# Altium PCB PANEL_ALL.PcbDoc
Units mil, origin at the board's own origin, x right, y up, seen from the top; angles counter-clockwise.
Board outline 12395 x 9800.57 mil, 2 copper layers (Top Layer, Bottom Layer); 60 components, 0 nets, 300 pads, 0 vias.
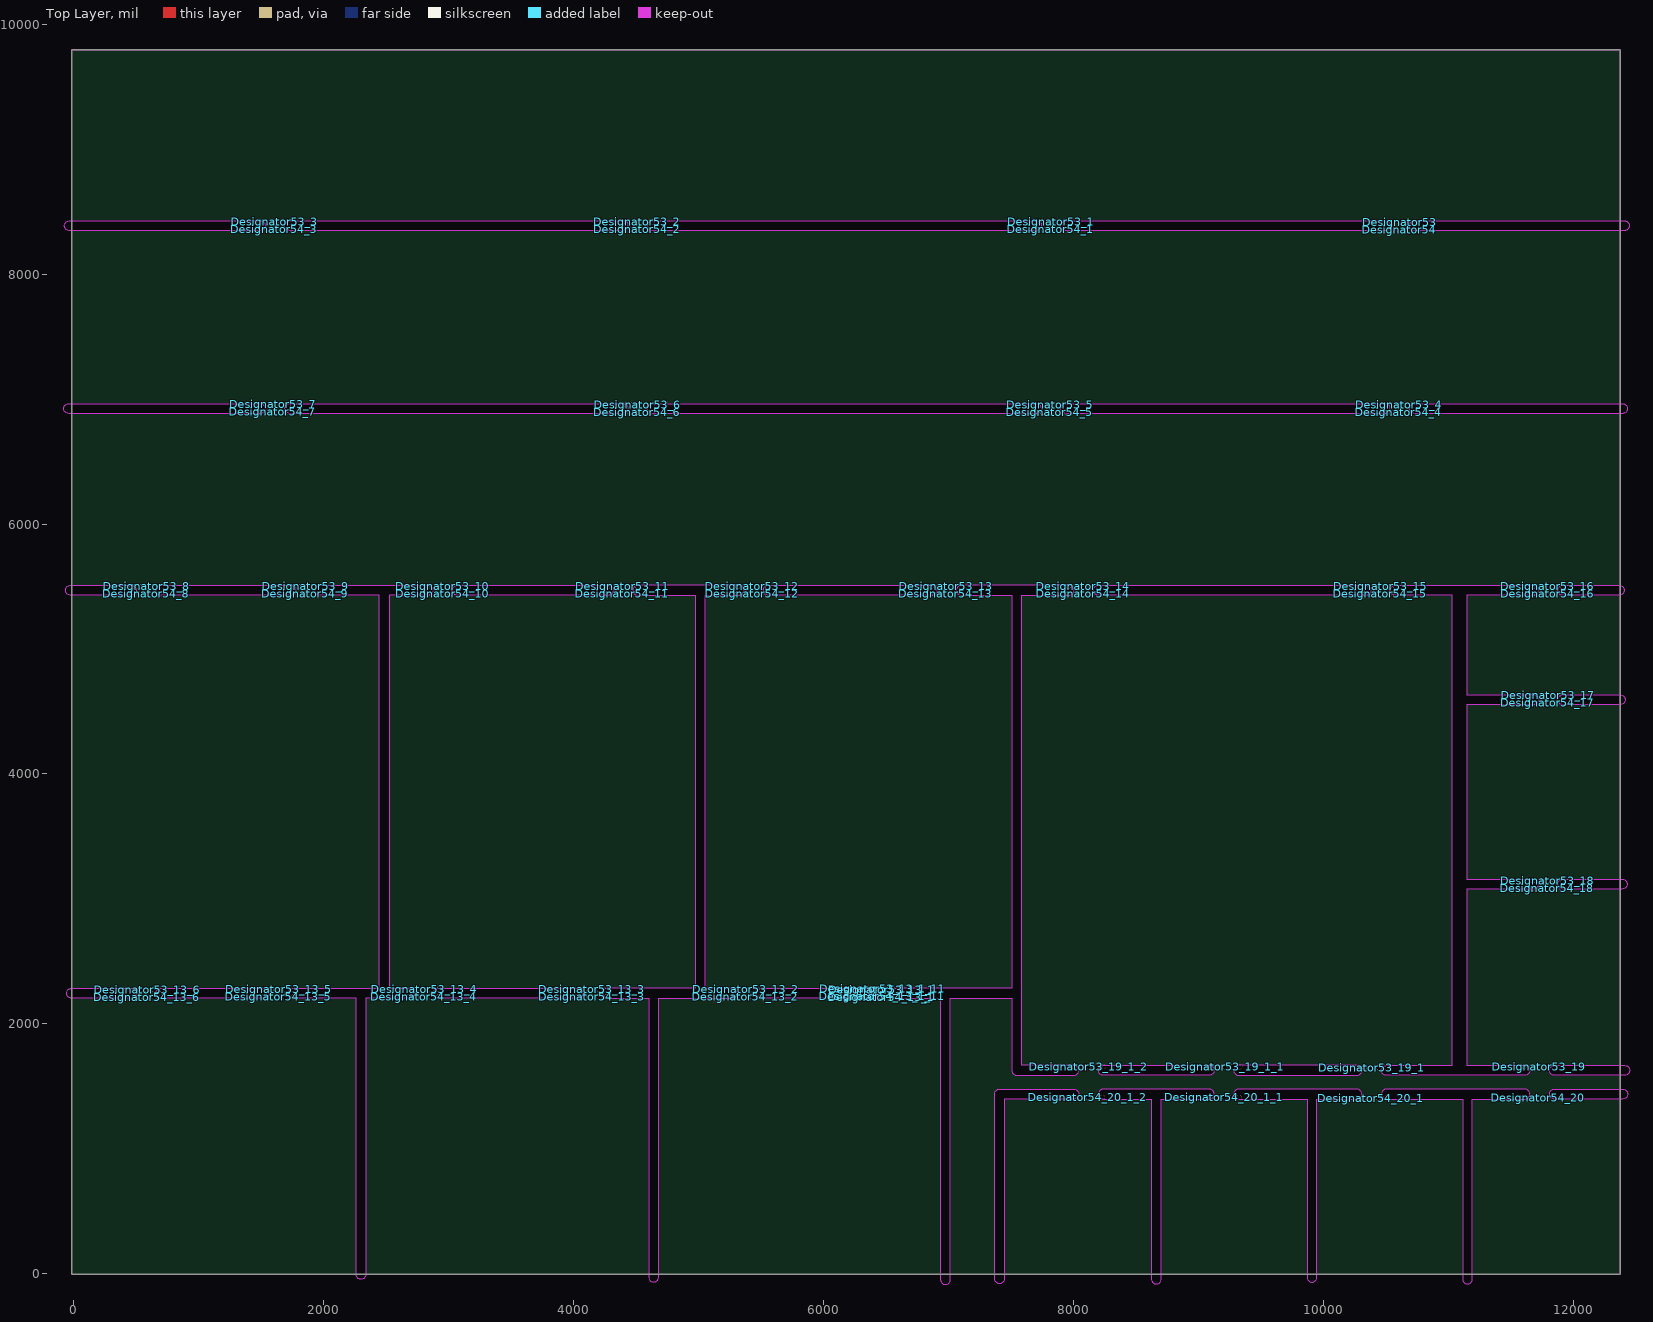
[diagram p0: Top Layer view]
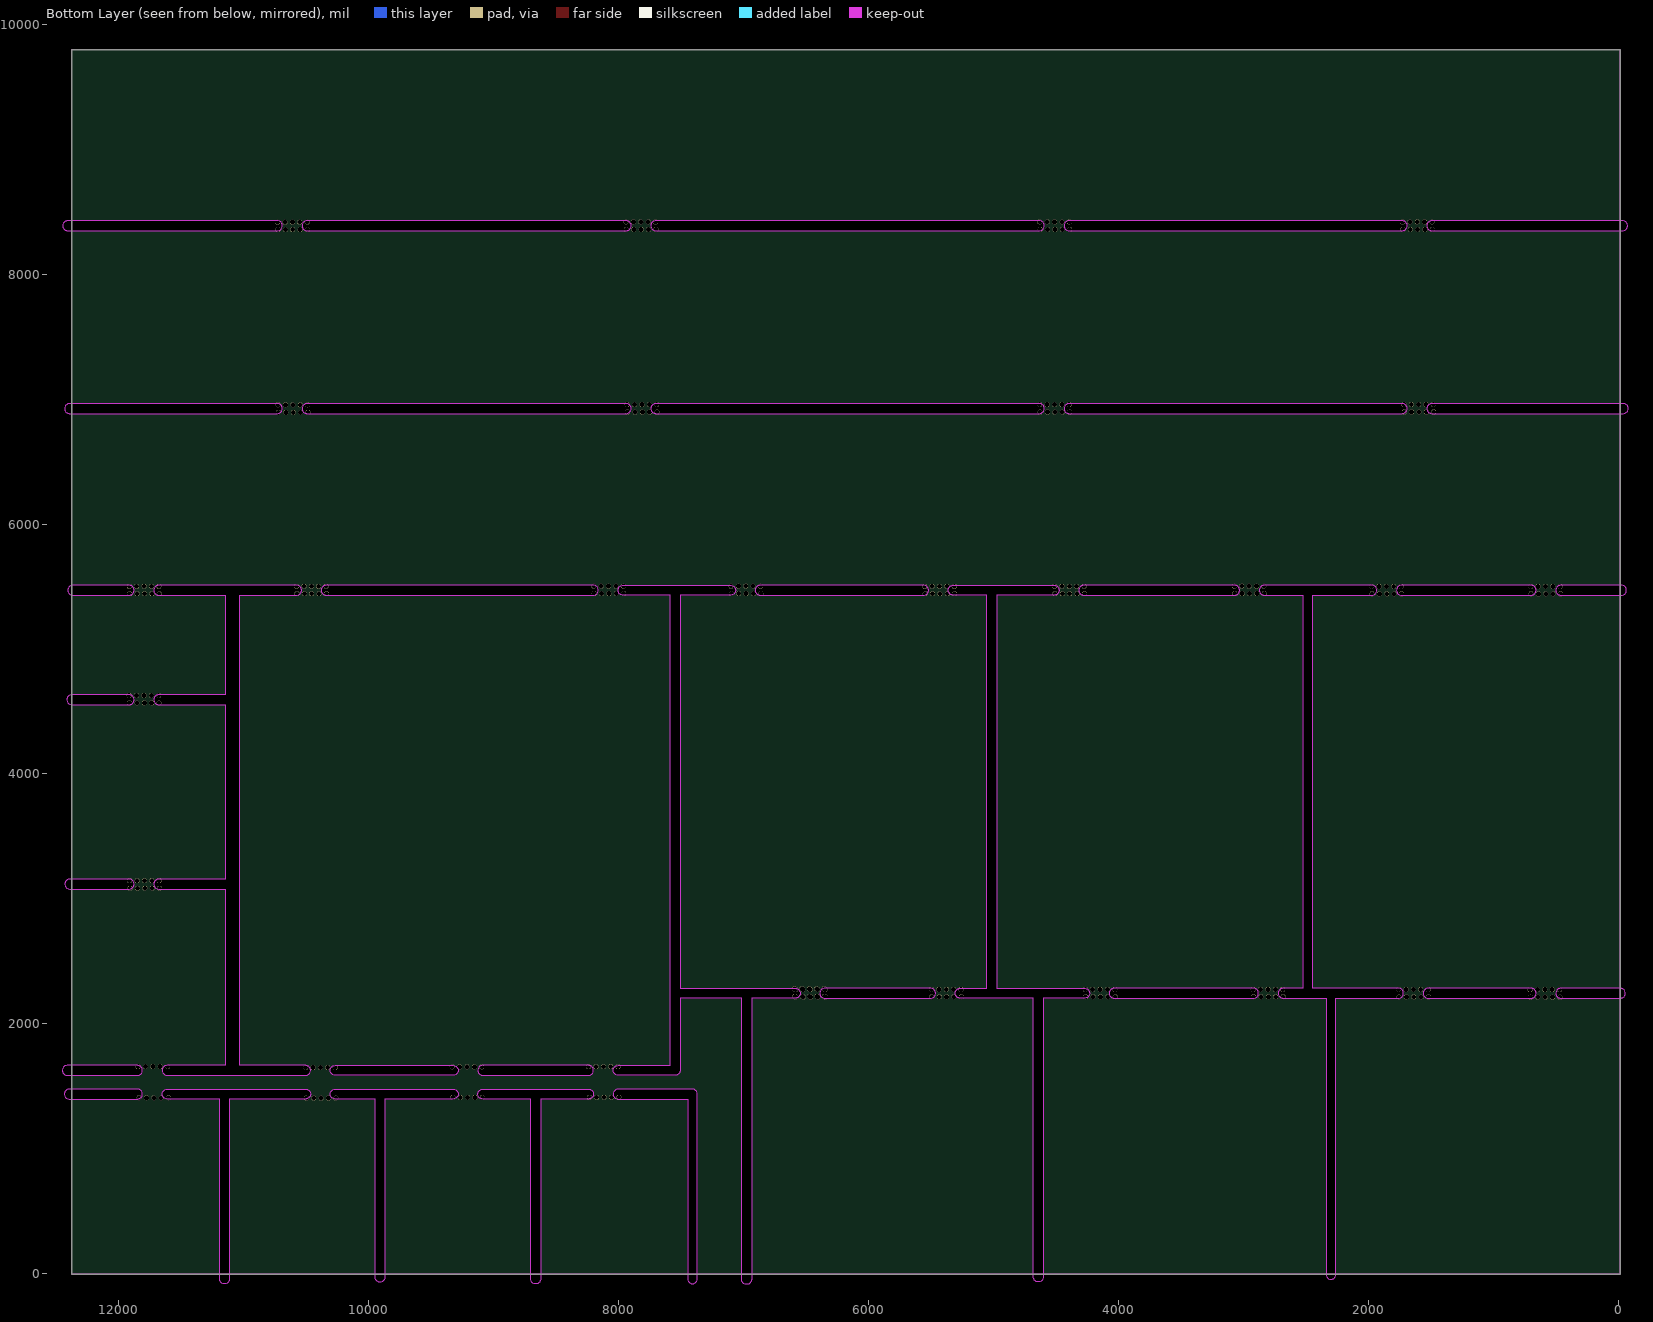
[diagram p1: Bottom Layer view, seen from below]

## Layer stack, top to bottom
Top Solder: solder mask 0.4, Solder Resist, Dk 3.5
Top Layer: signal copper 1.4
Dielectric 1: dielectric 12.6, FR-4, Dk 4.8
Bottom Layer: signal copper 1.4
Bottom Solder: solder mask 0.4, Solder Resist, Dk 3.5

## Board outline
-17,-4 12378,-4 12378,9796.57 -17,9796.57
cut-out: 2259.61,-6 2259.61,2204.61 1758,2204.61 cw(c1758,2244) 1758,2283.39 2444.61,2283.39 2444.61,5430.61 1971,5430.61 cw(c1971,5470) 1971,5509.39 2833,5509.39 cw(c2833,5470) 2872.39,5470 cw(c2833,5470) 2833,5430.61 2523.39,5430.61 2523.39,2283.39 2682,2283.39 cw(c2682,2244) 2721.39,2244 cw(c2682,2244) 2682,2204.61 2338.39,2204.61 2338.39,-6 cw(c2299,-6)
cut-out: 4270,2204.61 4601.61,2204.61 4601.61,-27 ccw(c4641,-27) 4680.39,-27 4680.39,2204.61 5267,2204.61 ccw(c5267,2244) 5306.39,2244 ccw(c5267,2244) 5267,2283.39 5053.39,2283.39 5053.39,5430.61 5323,5430.61 ccw(c5323,5470) 5362.39,5470 ccw(c5323,5470) 5323,5509.39 5026.39,5509.39 ccw(c5014,5472) 5001.61,5509.39 4514,5509.39 ccw(c4514,5470) 4514,5430.61 4974.61,5430.61 4974.61,2283.39 4270,2283.39 ccw(c4270,2244)
cut-out: 10506,1397.61 11115.61,1397.61 11115.61,-43 ccw(c11155,-43) 11194.39,-43 11194.39,1397.61 11615,1397.61 ccw(c11615,1437) 11654.39,1437 ccw(c11615,1437) 11615,1476.39 10506,1476.39 ccw(c10506,1437)
cut-out: 9324,1397.61 9870.61,1397.61 9870.61,-29 ccw(c9910,-29) 9949.39,-29 9949.39,1397.61 10270,1397.61 ccw(c10270,1437) 10309.39,1437 ccw(c10270,1437) 10270,1476.39 9324,1476.39 ccw(c9324,1437)
cut-out: 8241,1397.61 8625.11,1397.61 8625.11,-43.5 ccw(c8664.5,-43.5) 8703.89,-43.5 8703.89,1397.61 9088,1397.61 ccw(c9088,1437) 9127.39,1437 ccw(c9088,1437) 9088,1476.39 8241,1476.39 ccw(c8241,1437)
cut-out: 6586,2204.61 6936.61,2204.61 6936.61,-47 ccw(c6976,-47) 7015.39,-47 7015.39,2204.61 7508.61,2204.61 7508.61,1627 ccw(c7548,1627) 7548,1587.61 8005,1587.61 ccw(c8005,1627) 8044.39,1627 ccw(c8005,1627) 8005,1666.39 7587.39,1666.39 7587.39,2313 7587.38,5430.61 7966,5430.61 ccw(c7966,5470) 8005.39,5470 ccw(c7966,5470) 7966,5509.39 7104,5509.39 ccw(c7104,5470) 7104,5430.61 7508.61,5430.61 7508.61,2313 7508.61,2283.39 6991.08,2283.39 ccw(c6976,2247) 6960.92,2283.39 6586,2283.39 ccw(c6586,2244)
cut-out: 7369.61,-41 7369.61,1437 cw(c7409,1437) 7409,1476.39 8005,1476.39 cw(c8005,1437) 8044.39,1437 cw(c8005,1437) 8005,1397.61 7448.39,1397.61 7448.39,-41 cw(c7409,-41)
cut-out: 10731,6884.61 cw(c10731,6924) 10731,6963.39 12396,6963.39 cw(c12396,6924) 12435.39,6924 cw(c12396,6924) 12396,6884.61
cut-out: 10731,8348.61 cw(c10731,8388) 10731,8427.39 12411,8427.39 cw(c12411,8388) 12450.39,8388 cw(c12411,8388) 12411,8348.61
cut-out: 7939,6884.61 cw(c7939,6924) 7939,6963.39 10495,6963.39 cw(c10495,6924) 10534.39,6924 cw(c10495,6924) 10495,6884.61
cut-out: 7939,8348.61 cw(c7939,8388) 7939,8427.39 10495,8427.39 cw(c10495,8388) 10534.39,8388 cw(c10495,8388) 10495,8348.61
cut-out: 4632,6884.61 cw(c4632,6924) 4632,6963.39 7703,6963.39 cw(c7703,6924) 7742.39,6924 cw(c7703,6924) 7703,6884.61
cut-out: 4632,8348.61 cw(c4632,8388) 4632,8427.39 7703,8427.39 cw(c7703,8388) 7742.39,8388 cw(c7703,8388) 7703,8348.61
cut-out: 1728,6884.61 cw(c1728,6924) 1728,6963.39 4396,6963.39 cw(c4396,6924) 4435.39,6924 cw(c4396,6924) 4396,6884.61
cut-out: 1728,8348.61 cw(c1728,8388) 1728,8427.39 4396,8427.39 cw(c4396,8388) 4435.39,8388 cw(c4396,8388) 4396,8348.61
cut-out: -42,6884.61 cw(c-42,6924) -42,6963.39 1492,6963.39 cw(c1492,6924) 1531.39,6924 cw(c1492,6924) 1492,6884.61
cut-out: -36,8348.61 cw(c-36,8388) -36,8427.39 1492,8427.39 cw(c1492,8388) 1531.39,8388 cw(c1492,8388) 1492,8348.61
cut-out: 11918,5430.61 cw(c11918,5470) 11918,5509.39 12369,5509.39 cw(c12369,5470) 12408.39,5470 cw(c12369,5470) 12369,5430.61
cut-out: 8241,1587.61 cw(c8241,1627) 8241,1666.39 9088,1666.39 cw(c9088,1627) 9127.39,1627 cw(c9088,1627) 9088,1587.61
cut-out: 9324,1587.61 10270,1587.61 ccw(c10270,1627) 10309.39,1627 ccw(c10270,1627) 10270,1666.39 9324,1666.39 ccw(c9324,1627)
cut-out: 11851,1397.61 cw(c11851,1437) 11851,1476.39 12398,1476.39 cw(c12398,1437) 12437.39,1437 cw(c12398,1437) 12398,1397.61
cut-out: 11851,1587.61 cw(c11851,1627) 11851,1666.39 12414,1666.39 cw(c12414,1627) 12453.39,1627 cw(c12414,1627) 12414,1587.61
cut-out: 11918,3078.61 cw(c11918,3118) 11918,3157.39 12394,3157.39 cw(c12394,3118) 12433.39,3118 cw(c12394,3118) 12394,3078.61
cut-out: 11918,4554.61 cw(c11918,4594) 11918,4633.39 12377,4633.39 cw(c12377,4594) 12416.39,4594 cw(c12377,4594) 12377,4554.61
cut-out: 10506,1587.61 cw(c10506,1627) 10506,1666.39 11031.93,1666.39 11031.93,5430.61 10578,5430.61 cw(c10578,5470) 10578,5509.39 11682,5509.39 cw(c11682,5470) 11721.39,5470 cw(c11682,5470) 11682,5430.61 11150.07,5430.61 11150.07,4633.39 11682,4633.39 cw(c11682,4594) 11721.39,4594 cw(c11682,4594) 11682,4554.61 11150.07,4554.61 11150.07,3157.39 11682,3157.39 cw(c11682,3118) 11721.39,3118 cw(c11682,3118) 11682,3078.61 11150.07,3078.61 11150.07,1666.39 11615,1666.39 cw(c11615,1627) 11654.39,1627 cw(c11615,1627) 11615,1587.61
cut-out: 8202,5430.61 cw(c8202,5470) 8202,5509.39 10342,5509.39 cw(c10342,5470) 10381.39,5470 cw(c10342,5470) 10342,5430.61
cut-out: 5559,5430.61 cw(c5559,5470) 5559,5509.39 6868,5509.39 cw(c6868,5470) 6907.39,5470 cw(c6868,5470) 6868,5430.61
cut-out: 3069,5430.61 cw(c3069,5470) 3069,5509.39 4278,5509.39 cw(c4278,5470) 4317.39,5470 cw(c4278,5470) 4278,5430.61
cut-out: -27,5430.61 cw(c-27,5470) -27,5509.39 460,5509.39 cw(c460,5470) 499.39,5470 cw(c460,5470) 460,5430.61
cut-out: -18,2204.61 cw(c-18,2244) -18,2283.39 460,2283.39 cw(c460,2244) 499.39,2244 cw(c460,2244) 460,2204.61
cut-out: 696,2204.61 cw(c696,2244) 696,2283.39 1522,2283.39 cw(c1522,2244) 1561.39,2244 cw(c1522,2244) 1522,2204.61
cut-out: 696,5430.61 cw(c696,5470) 696,5509.39 1735,5509.39 cw(c1735,5470) 1774.39,5470 cw(c1735,5470) 1735,5430.61
cut-out: 2918,2204.61 cw(c2918,2244) 2918,2283.39 4034,2283.39 cw(c4034,2244) 4073.39,2244 cw(c4034,2244) 4034,2204.61
cut-out: 5503,2204.61 cw(c5503,2244) 5503,2283.39 6350,2283.39 cw(c6350,2244) 6389.39,2244 cw(c6350,2244) 6350,2204.61

## Design rules (kind name [scope] priority, off if disabled: settings)
Clearance [All] p1: gap=10 ignorepadtopadclearanceinfootprint=FALSE except(0: Arc-Hole Track-Hole SMDPad-Hole THPad-Hole Via-Hole Fill-Hole Poly-Hole Region-Hole Text-Hole)
PolygonConnect [All] p1: connectstyle=Relief reliefconductorwidth=10 reliefentries=4 polygonreliefangle="90 Angle" airgapwidth=10
RoutingVias [All] p1: holewidth=28 width=50 viastyle="Through Hole" minholewidth=28 minwidth=50 maxholewidth=28 maxwidth=50
SolderMaskExpansion [All] p1: expansion=4 istentingtop=FALSE
Width [All] p1: maxlimit=10 minlimit=10 preferedwidth=10
30 further rules are at their usual default settings.

## Components (designator, comment, footprint, x,y, rotation, side; value= is the part's Value field where it differs from the comment)
Designator53 "Comment" "Stamp Hole" 10493.89,8416 r0 top
Designator53_1 "Comment" "Stamp Hole" 7704.89,8418 r0 top
Designator53_2 "Comment" "Stamp Hole" 4392.89,8418 r0 top
Designator53_3 "Comment" "Stamp Hole" 1489.89,8418 r0 top
Designator53_4 "Comment" "Stamp Hole" 10489.89,6954 r0 top
Designator53_5 "Comment" "Stamp Hole" 7695.89,6956 r0 top
Designator53_6 "Comment" "Stamp Hole" 4393.89,6956 r0 top
Designator53_7 "Comment" "Stamp Hole" 1478.89,6957 r0 top
Designator53_8 "Comment" "Stamp Hole" 463.89,5501 r0 top
Designator53_9 "Comment" "Stamp Hole" 1736.89,5501 r0 top
Designator53_10 "Comment" "Stamp Hole" 2835.89,5503 r0 top
Designator53_11 "Comment" "Stamp Hole" 4274.89,5502 r0 top
Designator53_12 "Comment" "Stamp Hole" 5313.89,5502 r0 top
Designator53_13 "Comment" "Stamp Hole" 6864.89,5503 r0 top
Designator53_13_1 "Comment" "Stamp Hole" 6348.89,2274 r0 top
Designator53_13_1_11 "Comment" "Stamp Hole" 6355.89,2280 r0 top
Designator53_13_2 "Comment" "Stamp Hole" 5259.89,2276 r0 top
Designator53_13_3 "Comment" "Stamp Hole" 4028.89,2276 r0 top
Designator53_13_4 "Comment" "Stamp Hole" 2684.89,2276 r0 top
Designator53_13_5 "Comment" "Stamp Hole" 1520.89,2275 r0 top
Designator53_13_6 "Comment" "Stamp Hole" 468.89,2273 r0 top
Designator53_14 "Comment" "Stamp Hole" 7962.89,5503 r0 top
Designator53_15 "Comment" "Stamp Hole" 10341.89,5502 r0 top
Designator53_16 "Comment" "Stamp Hole" 11680.89,5502 r0 top
Designator53_17 "Comment" "Stamp Hole" 11681.89,4628 r0 top
Designator53_18 "Comment" "Stamp Hole" 11677.89,3145 r0 top
Designator53_19 "Comment" "Stamp Hole" 11610.89,1657 r0 top
Designator53_19_1 "Comment" "Stamp Hole" 10269.42,1649.28 r0 top
Designator53_19_1_1 "Comment" "Stamp Hole" 9096.34,1655.03 r0 top
Designator53_19_1_2 "Comment" "Stamp Hole" 8004.34,1656.03 r0 top
Designator54 "Comment" "Stamp Hole" 10490.89,8356 r0 top
Designator54_1 "Comment" "Stamp Hole" 7701.89,8358 r0 top
Designator54_2 "Comment" "Stamp Hole" 4389.89,8358 r0 top
Designator54_3 "Comment" "Stamp Hole" 1486.89,8358 r0 top
Designator54_4 "Comment" "Stamp Hole" 10486.89,6894 r0 top
Designator54_5 "Comment" "Stamp Hole" 7692.89,6896 r0 top
Designator54_6 "Comment" "Stamp Hole" 4390.89,6896 r0 top
Designator54_7 "Comment" "Stamp Hole" 1475.89,6897 r0 top
Designator54_8 "Comment" "Stamp Hole" 460.89,5441 r0 top
Designator54_9 "Comment" "Stamp Hole" 1733.89,5441 r0 top
Designator54_10 "Comment" "Stamp Hole" 2832.89,5443 r0 top
Designator54_11 "Comment" "Stamp Hole" 4271.89,5442 r0 top
Designator54_12 "Comment" "Stamp Hole" 5310.89,5442 r0 top
Designator54_13 "Comment" "Stamp Hole" 6861.89,5443 r0 top
Designator54_13_1 "Comment" "Stamp Hole" 6345.89,2214 r0 top
Designator54_13_1_11 "Comment" "Stamp Hole" 6352.89,2220 r0 top
Designator54_13_2 "Comment" "Stamp Hole" 5256.89,2216 r0 top
Designator54_13_3 "Comment" "Stamp Hole" 4025.89,2216 r0 top
Designator54_13_4 "Comment" "Stamp Hole" 2681.89,2216 r0 top
Designator54_13_5 "Comment" "Stamp Hole" 1517.89,2215 r0 top
Designator54_13_6 "Comment" "Stamp Hole" 465.89,2213 r0 top
Designator54_14 "Comment" "Stamp Hole" 7959.89,5443 r0 top
Designator54_15 "Comment" "Stamp Hole" 10338.89,5442 r0 top
Designator54_16 "Comment" "Stamp Hole" 11677.89,5442 r0 top
Designator54_17 "Comment" "Stamp Hole" 11678.89,4568 r0 top
Designator54_18 "Comment" "Stamp Hole" 11674.89,3085 r0 top
Designator54_20 "Comment" "Stamp Hole" 11602.89,1407 r0 top
Designator54_20_1 "Comment" "Stamp Hole" 10263.89,1405 r0 top
Designator54_20_1_1 "Comment" "Stamp Hole" 9090.81,1410.75 r0 top
Designator54_20_1_2 "Comment" "Stamp Hole" 7998.81,1411.75 r0 top

## Footprints (in the part's own frame and the unit in brackets; to place one, negate y for a bottom-side part, rotate by r counter-clockwise, add the part's x,y. Pads: shape width x height; smd on the part's side, far side on the other; paste and mask are expansions set on the pad)
"Stamp Hole" [mm]
  round 1 hole 1 mask+0.102: 5(0,0) 5(1.5,0) 5(3,0) 5(4.5,0) 5(6,0)

## Nets (pads, with @x,y where several pads share a name; then routed paths per layer and width w, separated by ;. In a path a pad name is that pad's centre, name@x,y a point inside that pad or via, vN(x,y) a via of type N, cw(c..) or ccw(c..) an arc to the next point about the centre after c; other vN are vias at no path point)
pads on no net: Designator53.5 Designator53_1.5 Designator53_2.5 Designator53_3.5 Designator53_4.5 Designator53_5.5 Designator53_6.5 Designator53_7.5 Designator53_8.5 Designator53_9.5 Designator53_10.5 Designator53_11.5 Designator53_12.5 Designator53_13.5 Designator53_13_1.5 Designator53_13_1_11.5 Designator53_13_2.5 Designator53_13_3.5 Designator53_13_4.5 Designator53_13_5.5 Designator53_13_6.5 Designator53_14.5 Designator53_15.5 Designator53_16.5 Designator53_17.5 Designator53_18.5 Designator53_19.5 Designator53_19_1.5 Designator53_19_1_1.5 Designator53_19_1_2.5 Designator54.5 Designator54_1.5 Designator54_2.5 Designator54_3.5 Designator54_4.5 Designator54_5.5 Designator54_6.5 Designator54_7.5 Designator54_8.5 Designator54_9.5 Designator54_10.5 Designator54_11.5 Designator54_12.5 Designator54_13.5 Designator54_13_1.5 Designator54_13_1_11.5 Designator54_13_2.5 Designator54_13_3.5 Designator54_13_4.5 Designator54_13_5.5 Designator54_13_6.5 Designator54_14.5 Designator54_15.5 Designator54_16.5 Designator54_17.5 Designator54_18.5 Designator54_20.5 Designator54_20_1.5 Designator54_20_1_1.5 Designator54_20_1_2.5

## Keep-outs
Keep-Out Layer:
  lines w8: -17,-4 -17,9796.57 12378,9796.57 12378,2395 12378,-4 -17,-4

## Silkscreen, mask and mechanical layers (free items; w line width, h text height)
Mechanical 1:
  lines w78.74: -42,6924 1492,6924 ; -36,8388 1492,8388 ; -27,5470 460,5470 ; -18,2244 460,2244 ; 696,2244 1522,2244 ; 696,5470 1735,5470 ; 1728,6924 4396,6924 ; 1728,8388 4396,8388 ; 1758,2244 2682,2244 ; 1971,5470 2833,5470 ; 2299,-6 2299,2242 ; 2484,2257 2484,5456 ; 2918,2244 4034,2244 ; 3069,5470 4278,5470 ; 4270,2244 5267,2244 ; 4514,5470 5323,5470 ; 4632,6924 7703,6924 ; 4632,8388 7703,8388 ; 4641,-27 4641,2238 ; 5014,2253 5014,5472 ; 5503,2244 6350,2244 ; 5559,5470 6868,5470 ; 6586,2244 7525,2244 ; 6976,-47 6976,2247 ; 7104,5470 7966,5470 ; 7409,-41 7409,1437 8005,1437 ; 7554,5464 7548,5458 7548,2313 7548,1627 8005,1627 ; 7939,6924 10495,6924 ; 7939,8388 10495,8388 ; 8202,5470 10342,5470 ; 8241,1437 9088,1437 ; 8241,1627 9088,1627 ; 8664.5,-43.5 8664.5,1437 ; 9324,1437 10270,1437 ; 9324,1627 10270,1627 ; 9910,-29 9910,1429 ; 10506,1437 11615,1437 ; 10506,1627 11615,1627 ; 10578,5470 11682,5470 ; 10731,6924 12396,6924 ; 10731,8388 12411,8388 ; 11097,4594 11682,4594 ; 11107,3118 11682,3118 ; 11155,-43 11155,1429 ; 11851,1437 12398,1437 ; 11851,1627 12414,1627 ; 11918,3118 12394,3118 ; 11918,4594 12377,4594 ; 11918,5470 12369,5470
  lines w118.11: 11091,1659 11091,5444

## Panel: embedded boards
"ledcube8x8x8.PcbDoc" at 11007,5410, 1 rows x 1 columns, spacing 2500 x 1500, rotation 180
"MCU_BOARD.PcbDoc" at 12346,1668, 1 rows x 2 columns, spacing 1248.74 x 1483.74, rotation 90
"PCB1.PcbDoc" at 12383.57,9799.36, 3 rows x 1 columns, spacing 1456.69 x 12479.74, rotation 180
"MCU_BOARD.PcbDoc" at 12367,-9, 4 rows x 1 columns, spacing 1248.74 x 1483.74, rotation 90
"PCB3.PcbDoc" at 2,5418, 3 rows x 1 columns, spacing 2528.74 x 3208.74, rotation 270
"PCB4.PcbDoc" at 0,0, 1 rows x 3 columns, spacing 2293.74 x 2338.74, rotation 0